# Altium PCB CFD_Chip_Test_v5_evenFootprintBadTDC.PcbDoc
Units mil, origin at the board's own origin, x right, y up, seen from the top; angles counter-clockwise.
Board outline 3675 x 2835 mil, 2 copper layers (Top Layer, Bottom Layer); 90 components, 63 nets, 345 pads, 124 vias.
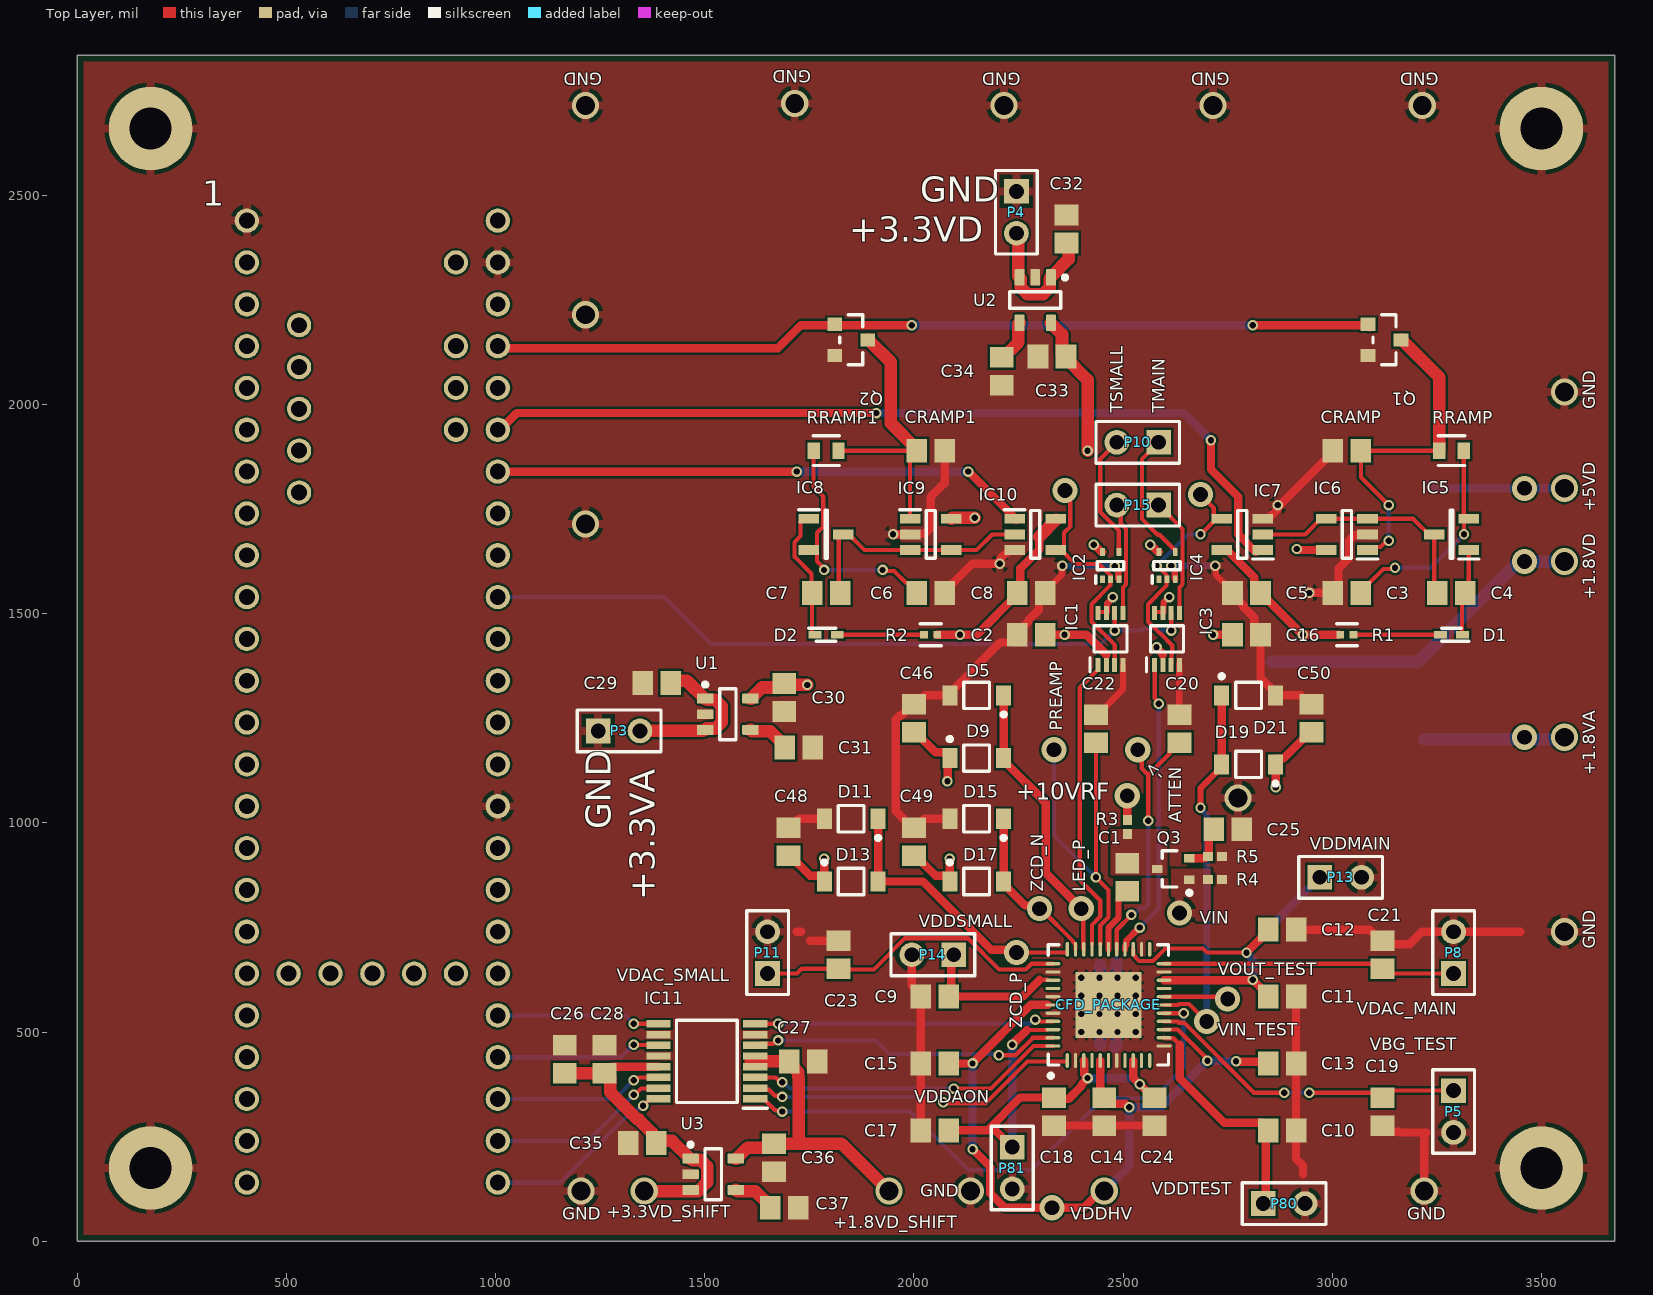
[diagram p0: Top Layer view]
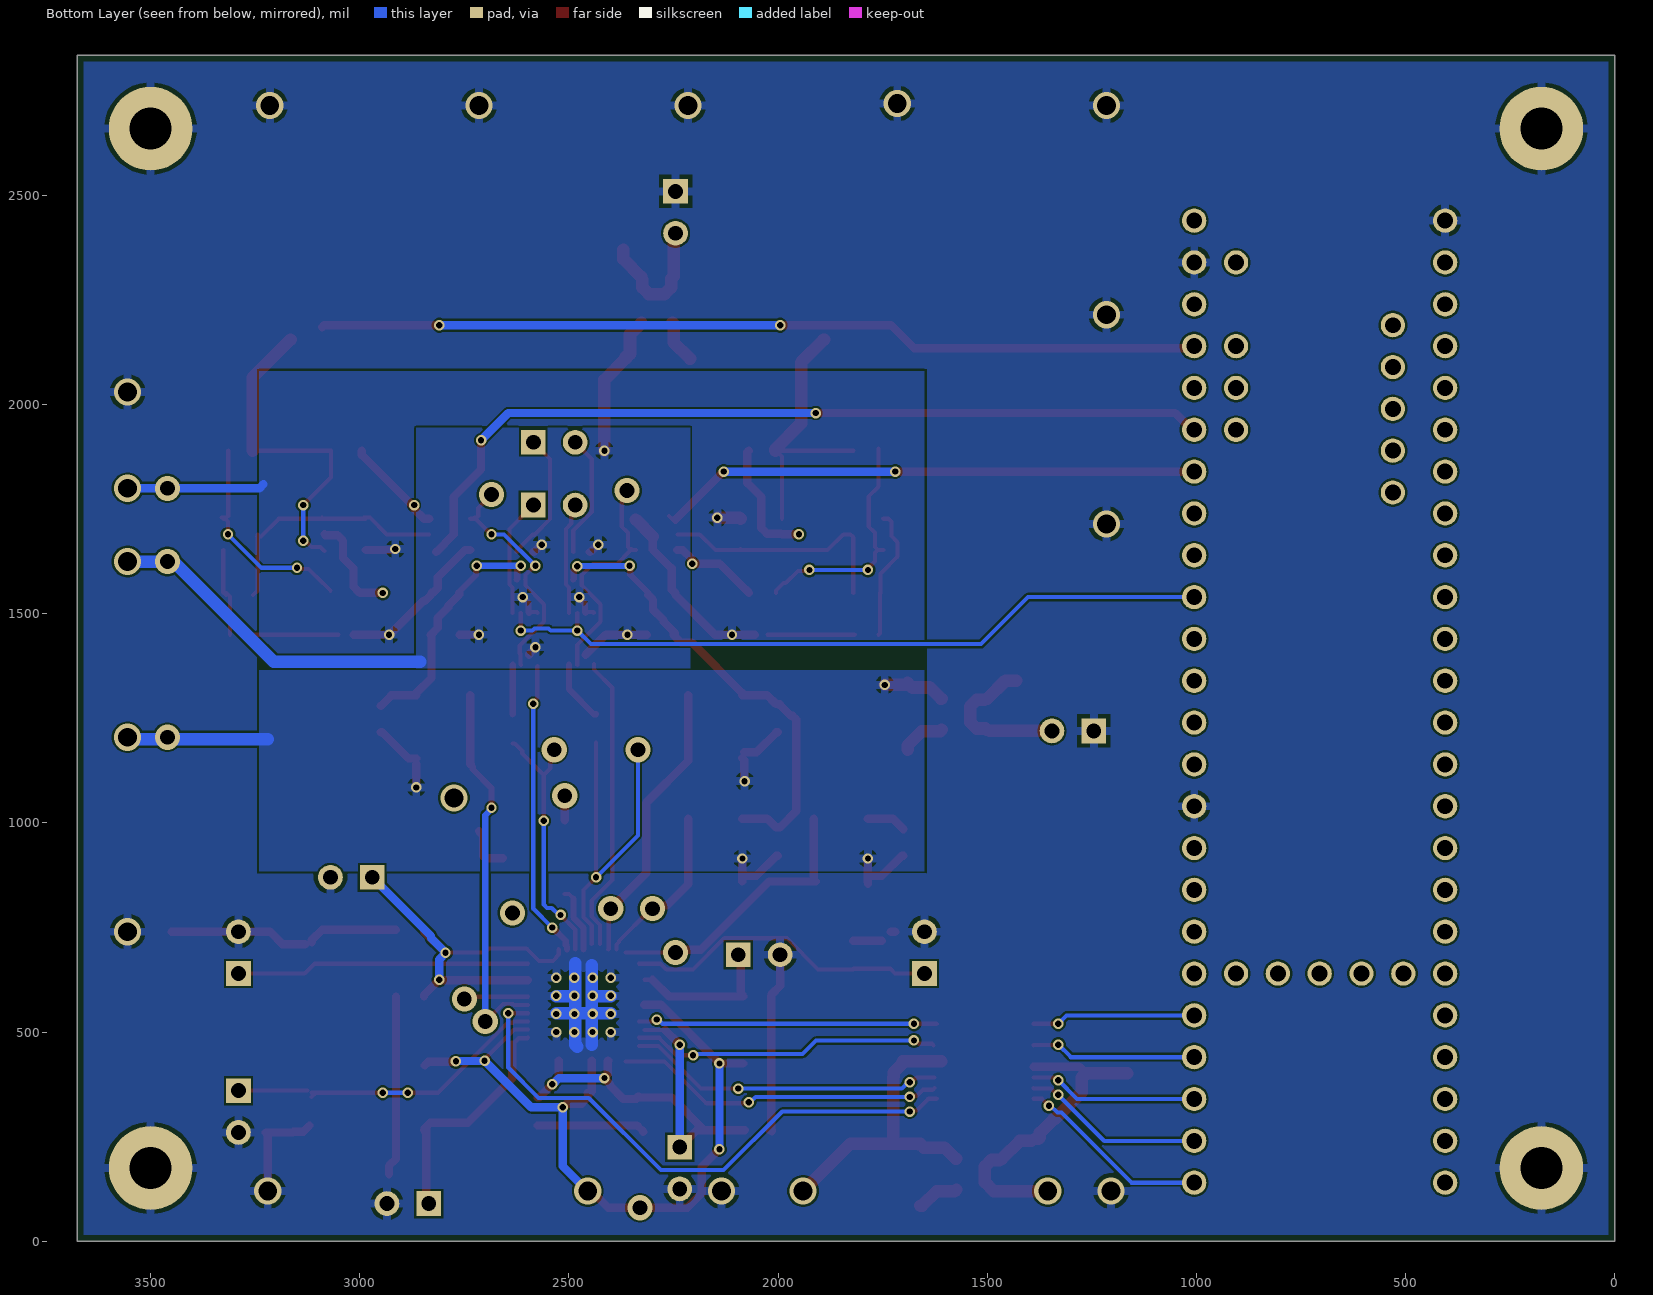
[diagram p1: Bottom Layer view, seen from below]

## Layer stack, top to bottom
Top Solder: solder mask 0.4, Solder Resist, Dk 3.5
Top Layer: signal copper 1.4
Dielectric 1: dielectric 12.6, FR-4, Dk 4.8
Bottom Layer: signal copper 1.4
Bottom Solder: solder mask 0.4, Solder Resist, Dk 3.5

## Board outline
0,0 3675,0 3675,2835 0,2835

## Design rules (kind name [scope] priority, off if disabled: settings)
AcuteAngle [All] p1: minimum=6.00000000000000E+0001 checktracksonly=FALSE
BoardOutlineClearance [All] p1: gap=15 ignorepadtopadclearanceinfootprint=FALSE
Clearance Clearance_outa_inner2 [InNamedPolygon('outa_inner2')] p1: gap=40 ignorepadtopadclearanceinfootprint=FALSE except(0: Arc-Hole Track-Hole SMDPad-Hole THPad-Hole Via-Hole Fill-Hole Poly-Hole Region-Hole Text-Hole)
Clearance Clearance_gnd_adc_vbus [InNamedPolygon('gnd_adc') vs InNet('VBUS')] p2: gap=60 ignorepadtopadclearanceinfootprint=FALSE except(0: Arc-Hole Track-Hole SMDPad-Hole THPad-Hole Via-Hole Fill-Hole Poly-Hole Region-Hole Text-Hole)
Clearance Clearance_gnd_adc [InNamedPolygon('gnd_adc')] p3: gap=20 ignorepadtopadclearanceinfootprint=FALSE except(0: Arc-Hole Track-Hole SMDPad-Hole THPad-Hole Via-Hole Fill-Hole Poly-Hole Region-Hole Text-Hole)
Clearance Clearance_dgnd [InNamedPolygon('dgnd')] p4: gap=15 ignorepadtopadclearanceinfootprint=FALSE except(0: Arc-Hole Track-Hole SMDPad-Hole THPad-Hole Via-Hole Fill-Hole Poly-Hole Region-Hole Text-Hole)
Clearance Clearance_vbus_keepout [InPolygon vs OnLayer('Keep-Out Layer')] p5: gap=20 ignorepadtopadclearanceinfootprint=FALSE except(0: Arc-Hole Track-Hole SMDPad-Hole THPad-Hole Via-Hole Fill-Hole Poly-Hole Region-Hole Text-Hole)
Clearance Clearance_vbus [InNamedPolygon('vbus')] p6: gap=60 ignorepadtopadclearanceinfootprint=FALSE except(0: Arc-Hole Track-Hole SMDPad-Hole THPad-Hole Via-Hole Fill-Hole Poly-Hole Region-Hole Text-Hole)
Clearance Clearance_gnd [InNamedPolygon('gnd')] p7: gap=10 ignorepadtopadclearanceinfootprint=FALSE except(0: Arc-Hole Track-Hole SMDPad-Hole THPad-Hole Via-Hole Fill-Hole Poly-Hole Region-Hole Text-Hole)
Clearance [All] p8: gap=5 ignorepadtopadclearanceinfootprint=FALSE except(0: Arc-Hole Track-Hole SMDPad-Hole THPad-Hole Via-Hole Fill-Hole Poly-Hole Region-Hole Text-Hole)
DiffPairsRouting [All] p1: maxlimit=25 minlimit=5 mostfreqgap=6 toplayer_minwidth=10 toplayer_maxwidth=15 toplayer_prefwidth=15 bottomlayer_minwidth=10 bottomlayer_maxwidth=15 bottomlayer_prefwidth=15 maxuncoupledlength=500
HoleSize [All] p1: absolutevalues=TRUE maxlimit=300 minlimit=10 maxpercent=80.000 minpercent=20.000
MinimumAnnularRing [All] p1: minimumring=5
MinimumSolderMaskSliver [All] p1: minsoldermaskwidth=2
PlaneConnect [All] p1: planeconnectstyle=Relief reliefexpansion=5 reliefentries=4 reliefconductorwidth=10 reliefairgap=10
PolygonConnect PolygonConnect_4 [All vs IsNamedPolygon('NONET_L-01_P-001')] p1: thpad.connectstyle=Relief thpad.reliefconductorwidth=20 thpad.reliefentries=4 thpad.polygonreliefangle="90 Angle" thpad.airgapwidth=10 smdpad.connectstyle=Direct smdpad.reliefconductorwidth=10 smdpad.reliefentries=4 smdpad.polygonreliefangle="90 Angle" smdpad.airgapwidth=10 via.connectstyle=Relief via.reliefconductorwidth=20 via.reliefentries=4 via.polygonreliefangle="90 Angle" via.airgapwidth=10
PolygonConnect PolygonConnect_3 [All] p2: thpad.connectstyle=Relief thpad.reliefconductorwidth=20 thpad.reliefentries=4 thpad.polygonreliefangle="90 Angle" thpad.airgapwidth=10 smdpad.connectstyle=Direct smdpad.reliefconductorwidth=10 smdpad.reliefentries=4 smdpad.polygonreliefangle="90 Angle" smdpad.airgapwidth=10 via.connectstyle=Relief via.reliefconductorwidth=20 via.reliefentries=4 via.polygonreliefangle="90 Angle" via.airgapwidth=10
PolygonConnect PolygonConnect_2 [All vs IsNamedPolygon('NONET_L-01_P-001')] p3: thpad.connectstyle=Relief thpad.reliefconductorwidth=10 thpad.reliefentries=4 thpad.polygonreliefangle="90 Angle" thpad.airgapwidth=10 smdpad.connectstyle=Direct smdpad.reliefconductorwidth=10 smdpad.reliefentries=4 smdpad.polygonreliefangle="90 Angle" smdpad.airgapwidth=10 via.connectstyle=Relief via.reliefconductorwidth=20 via.reliefentries=4 via.polygonreliefangle="90 Angle" via.airgapwidth=10
PolygonConnect PolygonConnect_1 [All vs IsNamedPolygon('NONET_L-01_P-001')] p4: thpad.connectstyle=Relief thpad.reliefconductorwidth=10 thpad.reliefentries=4 thpad.polygonreliefangle="90 Angle" thpad.airgapwidth=10 smdpad.connectstyle=Direct smdpad.reliefconductorwidth=10 smdpad.reliefentries=4 smdpad.polygonreliefangle="90 Angle" smdpad.airgapwidth=10 via.connectstyle=Relief via.reliefconductorwidth=20 via.reliefentries=4 via.polygonreliefangle="90 Angle" via.airgapwidth=10
PolygonConnect [All] p5: connectstyle=Relief reliefconductorwidth=6 reliefentries=4 polygonreliefangle="90 Angle" airgapwidth=6
RoutingVias [All] p1: holewidth=12 width=24 viastyle="Through Hole" minholewidth=10 minwidth=22 maxholewidth=200 maxwidth=200
SilkToSilkClearance [All] p1: silktosilkclearance=5
SilkToSolderMaskClearance [IsPad] p1: minsilkscreentomaskgap=3 clearancetoexposedcopper=FALSE
SolderMaskExpansion [All] p1: expansion=2.2 istentingtop=FALSE
Width [All] p1: maxlimit=1000 minlimit=5 preferedwidth=10 minimp=50.000000 maximp=50.000000 favimp=50.000000
24 further rules are at their usual default settings.

## Classes and differential pairs
component class TAC: C3 C4 C5 C6 C7 C8 CRAMP CRAMP1 D1 D2 IC5 IC6 IC7 IC8 IC9 IC10 Q1 Q2 R1 R2 RRAMP RRAMP1
component class Interface: 1 C1 C19 C20 C21 C22 C23 C25 C26 C27 C28 C29 C30 C31 C32 C33 C34 C35 C36 C37 C46 C48 C49 C50 D5 D9 D11 D13 D15 D17 D19 D21 IC11 P3 P4 P5 P8 P10 P11 P13 P14 P15 P80 P81 Q3 R3 R4 R5 U1 U2 U3
component class Chip: C2 C9 C10 C11 C12 C13 C14 C15 C16 C17 C18 C24 CFD_PACKAGE IC1 IC2 IC3 IC4

## Components (designator, comment, footprint, x,y, rotation, side; value= is the part's Value field where it differs from the comment)
1 "TEENSY_3.5/3.6" TEENSY_3.5/3.6 705,1340 r270 top
C1 "Value?" CAPC2013X140X45NL15T25 2510,870 r270 top
C2 ".01uF" CAPC2013X140X45NL15T25 2280,1450 r0 top
C3 ".1uF" CAPC2013X140X45NL15T25 3035,1550 r0 top
C4 "1uF" CAPC2013X140X45NL15T25 3285,1550 r0 top
C5 ".1uF" CAPC2013X140X45NL15T25 2795,1550 r0 top
C6 ".1uF" CAPC2013X140X45NL15T25 2040,1550 r180 top
C7 "1uF" CAPC2013X140X45NL15T25 1790,1550 r180 top
C8 ".1uF" CAPC2013X140X45NL15T25 2280,1550 r180 top
C9 ".01uF" CAPC2013X140X45NL15T25 2050,585 r0 top
C10 ".01uF" CAPC2013X140X45NL15T25 2880,265 r180 top
C11 ".01uF" CAPC2013X140X45NL15T25 2880,585 r180 top
C12 ".01uF" CAPC2013X140X45NL15T25 2880,745 r180 top
C13 ".01uF" CAPC2013X140X45NL15T25 2880,425 r180 top
C14 ".01uF" CAPC2013X140X45NL15T25 2455,310 r90 top
C15 ".01uF" CAPC2013X140X45NL15T25 2050,425 r0 top
C16 ".01uF" CAPC2013X140X45NL15T25 2795,1450 r180 top
C17 ".01uF" CAPC2013X140X45NL15T25 2050,265 r0 top
C18 ".01uF" CAPC2013X140X45NL15T25 2335,310 r90 top
C19 "(.01uF)" CAPC2013X140X45NL15T25 3120,310 r90 top
C20 "(.01uF)" CAPC2013X140X45NL15T25 2635,1225 r270 top
C21 "(.01uF)" CAPC2013X140X45NL15T25 3120,685 r270 top
C22 "(.01uF)" CAPC2013X140X45NL15T25 2435,1225 r270 top
C23 "(.01uF)" CAPC2013X140X45NL15T25 1820,685 r270 top
C24 ".01uF" CAPC2013X140X45NL15T25 2575,310 r90 top
C25 "" CAPC2013X140X45NL15T25 2750,985 r180 top
C26 ".1uF" CAPC2013X140X45NL15T25 1165,435 r270 top
C27 ".1uF" CAPC2013X140X45NL15T25 1735,430 r0 top
C28 "1uF" CAPC2013X140X45NL15T25 1260,435 r270 top
C29 "" CAPC2013X140X45NL15T25 1385,1335 r0 top
C30 "" CAPC2013X140X45NL15T25 1690,1300 r90 top
C31 "" CAPC2013X140X45NL15T25 1725,1180 r180 top
C32 "" CAPC2013X140X45NL15T25 2365,2420 r270 top
C33 "" CAPC2013X140X45NL15T25 2330,2115 r0 top
C34 "" CAPC2013X140X45NL15T25 2210,2080 r90 top
C35 "" CAPC2013X140X45NL15T25 1350,235 r0 top
C36 "" CAPC2013X140X45NL15T25 1665,200 r90 top
C37 "" CAPC2013X140X45NL15T25 1690,80 r180 top
C46 ".01uF" CAPC2013X140X45NL15T25 2000,1250 r270 top
C48 ".01uF" CAPC2013X140X45NL15T25 1700,955 r270 top
C49 ".01uF" CAPC2013X140X45NL15T25 2000,955 r270 top
C50 ".01uF" CAPC2013X140X45NL15T25 2950,1250 r270 top
CFD_PACKAGE "CFD_package" QFN50P700X700X80_HS-45N_WIDEVIAS 2465,565 r90 top
CRAMP "1nF" CAPC2013X140X45NL15T25 3035,1890 r0 top
CRAMP1 "1nF" CAPC2013X140X45NL15T25 2040,1890 r180 top
D1 "1N4148WT" SODFL1608X70N 3285,1450 r180 top
D2 "1N4148WT" SODFL1608X70N 1790,1450 r0 top
D5 "" ONSC-SOD-123-2-425-04_V 2150,1155 r0 top
D9 "" ONSC-SOD-123-2-425-04_V 2150,1305 r180 top
D11 "" ONSC-SOD-123-2-425-04_V 1850,860 r0 top
D13 "" ONSC-SOD-123-2-425-04_V 1850,1010 r180 top
D15 "" ONSC-SOD-123-2-425-04_V 2150,860 r0 top
D17 "" ONSC-SOD-123-2-425-04_V 2150,1010 r180 top
D19 "" ONSC-SOD-123-2-425-04_V 2800,1140 r180 top
D21 "" ONSC-SOD-123-2-425-04_V 2800,1305 r0 top
IC1 "NL17SZ74USG" SOP50P310X90-8N 2470,1440 r90 top
IC2 "NL17SZ14XV5T2G" SOTFL50P160X60-5N 2470,1615 r90 top
IC3 "NL17SZ74USG" SOP50P310X90-8N 2605,1440 r90 top
IC4 "NL17SZ14XV5T2G" SOTFL50P160X60-5N 2605,1615 r90 top
IC5 "MAX6018BEUR18+T" SOT95P237X112-3N 3285,1690 r180 top
IC6 "MAX4490AUK+T" SOT95P280X145-5N 3035,1690 r180 top
IC7 "TMUX1101DBVR" SOT95P280X145-5N 2785,1690 r180 top
IC8 "MAX6018BEUR18+T" SOT95P237X112-3N 1790,1690 r0 top
IC9 "MAX4490AUK+T" SOT95P280X145-5N 2040,1690 r0 top
IC10 "TMUX1101DBVR" SOT95P280X145-5N 2290,1690 r0 top
IC11 "MAX13003EEUE+" SOP65P640X110-16N 1505,430 r180 top
P3 "Header 2" HDR1X2 1245,1220 r0 top
P4 "Header 2" HDR1X2 2245,2510 r270 top
P5 "Header 2" HDR1X2 3290,360 r270 top
P8 "Header 2" HDR1X2 3290,640 r90 top
P10 "Header 2" HDR1X2 2585,1910 r180 top
P11 "Header 2" HDR1X2 1650,640 r90 top
P13 "Header 2" HDR1X2 2970,870 r0 top
P14 "Header 2" HDR1X2 2095,685 r180 top
P15 "Header 2" HDR1X2 2585,1760 r180 top
P80 "Header 2" HDR1X2 2835,90 r0 top
P81 "Header 2" HDR1X2 2235,225 r270 top
Q1 "2N7002K" FP-318-08-MFG 3125,2155 r0 top
Q2 "2N7002K" FP-318-08-MFG 1850,2155 r0 top
Q3 "BFR182W" INF-SOT323_L 2620,890 r180 top
R1 "470Ohm" FP-CRCW0402-e3-IPC_C 3035,1450 r180 top
R2 "470Ohm" FP-CRCW0402-e3-IPC_C 2040,1450 r0 top
R3 "" RESC1005X40X25NL05T10 2510,990 r270 top
R4 "(50Ohm)" RESC1005X40X25NL05T10 2720,865 r180 top
R5 "" RESC1005X40X25NL05T10 2720,920 r180 top
RRAMP "1kOhm" FP-CRCW0603-e3-MFG 3285,1890 r0 top
RRAMP1 "1kOhm" FP-CRCW0603-e3-MFG 1790,1890 r180 top
U1 "TPS73218DBVT" DBV0005A_N 1555,1260 r0 top
U2 "TPS73218DBVT" DBV0005A_N 2290,2250 r270 top
U3 "TPS73218DBVT" DBV0005A_N 1520,160 r0 top

## Footprints (in the part's own frame and the unit in brackets; to place one, negate y for a bottom-side part, rotate by r counter-clockwise, add the part's x,y. Pads: shape width x height; smd on the part's side, far side on the other; paste and mask are expansions set on the pad)
CAPC2013X140X45NL15T25 [mm] "Chip Capacitor, 2-Leads, Body 2.00x1.25mm, IPC Medium Density"
  rect 1.25x1.45 smd: 1(-0.85,0) 2(0.85,0)
  body extent -1.08,-0.7 1.07,0.7, height 1.4
DBV0005A_N [mm] "SOT23, 5-Leads, Body 3.05x1.75mm, Pitch 0.95mm, IPC Medium Density"
  rrect17% 1x0.6 smd: 1(-1.375,0.95) 2(-1.375,0) 3(-1.375,-0.95) 4(1.375,-0.95) 5(1.375,0.95)
  silkscreen extent -1.5,-1.55 0.5,1.92, body extent -1.42,-1.46 1.42,1.46, height 1.08
FP-318-08-MFG [mm]
  rect 0.9x0.8 smd paste+0 mask+0: 1(-1,0.95) 2(-1,-0.95) 3(1,0)
  silkscreen extent -0.7,-1.52 0.7,1.52, body extent -1.55,-1.62 1.55,1.62, height 0.25
FP-CRCW0402-e3-IPC_C [mil]
  rect 18.43x18.6 smd paste+0 mask+0: 1(-15.83,0) 2(15.83,0)
  silkscreen extent -25,-27 25,27, body extent -29,-15 29,15, height 10
FP-CRCW0603-e3-MFG [mm]
  rect 0.75x1 smd paste+0 mask+0: 1(-0.75,0) 2(0.75,0)
  silkscreen extent -0.8,-0.9 0.8,0.9, body extent -1.22,-0.6 1.22,0.6, height 0.25
HDR1X2 [mm] "Connector; Header; 2 Position"
  rect 1.5x1.5 hole 0.9: 1(0,0)
  round 1.5 hole 0.9: 2(2.54,0)
  silkscreen extent -1.27,-1.27 3.81,1.27
INF-SOT323_L [mm] "SOT23, 3-Leads, Body 2x1.25 mm, Pitch 0.65 mm, IPC High Density"
  rect 0.65x0.5 smd: 1(-0.975,0.65) 2(-0.975,-0.65) 3(0.975,0)
  silkscreen extent -1.1,-1.1 0.67,1.57, body extent -0.67,-1.1 0.67,1.1, height 1
ONSC-SOD-123-2-425-04_V [mm] "SOD, 2-Leads, Body 2.69x1.6mm"
  rect 0.91x1.22 smd: 1(-1.635,0) 2(1.635,0)
  silkscreen extent -1.76,-0.8 0.78,1.28, body extent -1.35,-0.8 1.35,0.8, height 1.35
QFN50P700X700X80_HS-45N_WIDEVIAS [mm] "QFN, 44-Leads, Body 7.00x7.00mm, Pitch 0.50mm, Thermal Pad 4.00x4.00mm, IPC Medium Density"
  oval 0.9x0.2 smd: 1(-3.375,2.5) 2(-3.375,2) 3(-3.375,1.5) 4(-3.375,1) 5(-3.375,0.5) 6(-3.375,0) 7(-3.375,-0.5) 8(-3.375,-1) 9(-3.375,-1.5) 10(-3.375,-2) 11(-3.375,-2.5) 23(3.375,-2.5) 24(3.375,-2) 25(3.375,-1.5) 26(3.375,-1) 27(3.375,-0.5) 28(3.375,0) 29(3.375,0.5) 30(3.375,1) 31(3.375,1.5) 32(3.375,2) 33(3.375,2.5)
  oval 0.2x0.9 smd: 12(-2.5,-3.375) 13(-2,-3.375) 14(-1.5,-3.375) 15(-1,-3.375) 16(-0.5,-3.375) 17(0,-3.375) 18(0.5,-3.375) 19(1,-3.375) 20(1.5,-3.375) 21(2,-3.375) 22(2.5,-3.375) 34(2.5,3.375) 35(2,3.375) 36(1.5,3.375) 37(1,3.375) 38(0.5,3.375) 39(0,3.375) 40(-0.5,3.375) 41(-1,3.375) 42(-1.5,3.375) 43(-2,3.375) 44(-2.5,3.375)
  rect 4x4 smd: 35(0,0)
  silkscreen extent -4.42,-3.65 3.65,3.65, body extent -3.5,-3.5 3.5,3.5, height 0.8
RESC1005X40X25NL05T10 [mm] "Chip Resistor, 2-Leads, Body 1.00x0.50mm, IPC Medium Density"
  rect 0.6x0.55 smd: 1(-0.425,0) 2(0.425,0)
  body extent -0.53,-0.27 0.53,0.28, height 0.4
SODFL1608X70N [mm]
  rect 0.78x0.47 smd: 1(-0.675,0) 2(0.675,0)
  silkscreen extent -1.06,-0.4 0.6,0.4, body extent -0.8,-0.4 0.8,0.4, height 0.7
SOP50P310X90-8N [mm]
  rect 0.85x0.3 smd: 1(-1.575,0.75) 2(-1.575,0.25) 3(-1.575,-0.25) 4(-1.575,-0.75) 5(1.575,-0.75) 6(1.575,-0.25) 7(1.575,0.25) 8(1.575,0.75)
  silkscreen extent -2,-1 0.8,1.25, body extent -1.55,-1 1.55,1, height 0.9
SOP65P640X110-16N [mm]
  rect 1.475x0.45 smd: 1(-2.938,2.275) 2(-2.938,1.625) 3(-2.938,0.975) 4(-2.938,0.325) 5(-2.938,-0.325) 6(-2.938,-0.975) 7(-2.938,-1.625) 8(-2.938,-2.275) 9(2.938,-2.275) 10(2.938,-1.625) 11(2.938,-0.975) 12(2.938,-0.325) 13(2.938,0.325) 14(2.938,0.975) 15(2.938,1.625) 16(2.938,2.275)
  silkscreen extent -3.67,-2.5 1.85,2.85, body extent -3.2,-2.5 3.2,2.5, height 1.1
SOT95P237X112-3N [mm]
  rect 1.25x0.6 smd: 1(-1.05,0.95) 2(-1.05,-0.95) 3(1.05,0)
  silkscreen extent -1.68,-1.46 0.08,1.5, body extent -1.18,-1.46 1.18,1.46, height 1.12
SOT95P280X145-5N [mm]
  rect 1.25x0.6 smd: 1(-1.25,0.95) 2(-1.25,0) 3(-1.25,-0.95) 4(1.25,-0.95) 5(1.25,0.95)
  silkscreen extent -1.88,-1.45 0.28,1.5, body extent -1.4,-1.45 1.4,1.45, height 1.45
SOTFL50P160X60-5N [mm]
  rect 0.465x0.3 smd: 1(-0.832,0.5) 2(-0.832,0) 3(-0.832,-0.5) 4(0.832,-0.5) 5(0.832,0.5)
  silkscreen extent -1.06,-0.8 0.25,0.9, body extent -0.8,-0.8 0.8,0.8, height 0.6
TEENSY_3.5/3.6 [mil]
  round 58 / inner round 60 / far side round 58 hole 38: 0/RX(-1000,-300) 1/TX(-900,-300) 2(-800,-300) 3/CANTX(-700,-300) 3V3(300,-300) 3V3_2(700,-100) 3V3_LO(-900,300) 4/CANRX(-600,-300) 5(-500,-300) 6(-400,-300) 7(-300,-300) 8(-200,-300) 9/CS(-100,-300) 10/CS(0,-300) 11/MOSI(100,-300) 12/MISO(200,-300) 13/SCK(200,300) 14/A0(100,300) 15/A1(0,300) 16/A2(-100,300) 17/A3(-200,300) 18/A4/SDA(-300,300) 19/A5/SCL(-400,300) 20/A6(-500,300) 21/A7(-600,300) 21/DAC0(500,300) 22/A8(-700,300) 23/A9(-800,300) 24(400,-300) 25(500,-300) 26(600,-300) 27(700,-300) 28(800,-300) 29(900,-300) 30(1000,-300) 31/A12(1100,-300) 32/A13(1200,-300) 33/A14(1200,300) 34/A15(1100,300) 35/A16(1000,300) 36/A17(900,300) 37/A18(800,300) 38/A19(700,300) 39/A20(600,300) A10(-700,200) A11(-600,200) A22/DAC1(400,300) AGND(-1000,300) AREF(-800,200) GND(-1100,-300) GND2(300,300) GND3(700,0) PROG(700,100) RESET(700,200) U5V(-850,-175) UD+(-650,-175) UD-(-750,-175) UGND1(-550,-175) UGND2(-450,-175) VBAT(700,-200) VIN(-1100,300) VUSB(-1000,200)

## Part data
C1 C2 C3 C4 C5 C6 C7 C8 C9 C10 C11 C12 C13 C14 C15 C16 C17 C18 C19 C20 C21 C22 C23 C24 C25 C26 C27 C28 C29 C30 C31 C32 C33 C34 C35 C36 C37 C46 C48 C49 C50 CRAMP CRAMP1: library part CMP-2007-03395-1, "0402", Manufacturer=Murata, Part Number=GRM21BR71A106KE51L
D1 D2: "Diode", Manufacturer_Name=SEMTECH, Datasheet Link=https://datasheet.lcsc.com/szlcsc/Semtech-1N4148WT_C27748.pdf, Height=0.7mm, Manufacturer_Part_Number=1N4148WT
D5 D9 D11 D13 D15 D17 D19 D21: library part CMP-1060-00509-1, "Zener Voltage Regulator, 2-Pin SOD-123, Pb-Free, Tape and Reel", Manufacturer="On Semiconductor", PartNumber=MMSZ4679T1G, ComponentLink1Description="Manufacturer URL", ComponentLink1URL=http://www.onsemi.com/, ComponentLink2Description=Datasheet, ComponentLink2URL=http://www.onsemi.com/pub_link/Collateral/MMSZ4678T1-D.PDF, ComponentLink3Description="Package Specification", ComponentLink3URL=http://www.onsemi.com/pub_link/Collateral/425-04.PDF, DatasheetVersion="Rev. 9", Mounting Technology="Surface Mount", P Max (W)=0.5, PackageDescription="2-Pin SOD, Body 1.6 x 2.69 mm", PackageReference=SOD-123-2-425-04, PackageVersion="Rev. G, 10/2009", Packing="Tape and Reel", RoHS=Pb-Free, VZ Typ (V)=2
IC1 IC3: "Flip Flops 1.65-5.5V CMOS Single D-Type", Manufacturer_Name="ON Semiconductor", Datasheet Link=http://www.onsemi.com/pub/Collateral/NL17SZ74-D.PDF, Height=0.9mm, Manufacturer_Part_Number=NL17SZ74USG
IC2 IC4: "Integrated Circuit", Manufacturer_Name="ON Semiconductor", Mouser2 Part Number=863-NL17SZ14XV5T2G, Datasheet Link=https://componentsearchengine.com//NL17SZ14XV5T2G.pdf, Height=0.6mm, Manufacturer_Part_Number=NL17SZ14XV5T2G, Mouser2 Price/Stock=https://www.mouser.com/Search/Refine.aspx?Keyword=863-NL17SZ14XV5T2G
IC5 IC8: "Voltage References Precision, Micropower, 1.8V Supply, Low-Dropout, SOT23 Voltage Reference", Manufacturer_Name="Maxim Integrated", Datasheet Link=https://pdfserv.maximintegrated.com/en/ds/MAX6018-MAX6018B.pdf, Height=1.12mm, Manufacturer_Part_Number=MAX6018BEUR18+T
IC6 IC9 IC11: "Integrated Circuit", Manufacturer_Name="Maxim Integrated"
  IC6 IC9: Datasheet Link=https://pdfserv.maximintegrated.com/en/ds/MAX4490-MAX4492.pdf, Height=1.45mm, Manufacturer_Part_Number=MAX4490AUK+T
  IC11: Datasheet Link=https://pdfserv.maximintegrated.com/en/ds/MAX13000E-MAX13005E.pdf, Height=1.1mm, Manufacturer_Part_Number=MAX13003EEUE+
IC7 IC10: "Analog Switch ICs 3-pA on-state leakage current, 5-V, 1:1 (SPST), 1-channel precision switch (active low) 5-SOT-23 -40 to 125", Manufacturer_Name="Texas Instruments", Datasheet Link=https://www.ti.com/lit/ds/symlink/tmux1101.pdf?ts=1618527438207, Height=1.45mm, Manufacturer_Part_Number=TMUX1101DBVR
P3 P4 P5 P8 P10 P11 P13 P14 P15 P80 P81: "Header, 2-Pin", LatestRevisionDate=17-Jul-2002, LatestRevisionNote="Re-released for DXP Platform.", Publisher="Altium Limited"
Q1 Q2: library part CMP-07173-000009-1, "MOSFET N-CH 60V 300MA SOT23", Continuous Drain Current=320mA, Drain To Source Breakdown Voltage=60V, Drain To Source Resistance=1.19Ω, Gate To Source Voltage=20V, Input Capacitace At Vds="24.5pF @ 20V", Manufacturer="ON Semiconductor", Max Forward Diode Voltage=1.2V, Max Junction Temp=+150°C, Package=318-08, Power Dissipation=300mW, Pulse Drain Current=5A, Temperature="-55°C to +150°C", Temperature Range Low=-55°C, Typ Forward Diode Voltage=0.8V, Automotive=No, Category=Trans, ComponentLink2Description=Datasheet, ComponentLink2URL=https://www.onsemi.com/pub/Collateral/2N7002K-D.pdf, Depletion Mode=False, Device Class L1="Discrete Semiconductors", Device Class L2=Transistors, Device Class L3=MOSFETs, Digikey Description="MOSFET N-CH 60V 300MA SOT23", Drain To Source Voltage=60V, Footprint Url=https://www.onsemi.com/pub/Collateral/318-08.PDF, Gate Charge At Vgs="0.7nC @ 4.5V", Height=1.11mm, Ipc Land Pattern Name=SOT95P240X100-3, Lead Free=Yes, Manufacturer Part Number=2N7002K, Mouser Description="N-Channel 60 V 2 Ohm SMT Enhancement Mode Field Effect Transistor SOT-23", Number Of Channels=1, Number Of N Channels=1, Octopart=https://octopart.com/2n7002k-on+semiconductor-84408900, RoHS=TRUE, Rthja Max=417°C/W, Standoff Height=0.01mm, Temperature Range High=+150°C, Threshold Vgs Max=2.3V, Threshold Vgs Min=1V, Transconductance=0.53S, Turn Off Delay Time=55.8ns, Turn On Delay Time=12.2ns
Q3: library part CMP-1191-00013-1, "NPN Silicon RF Transistor, 12 V VCEO, 35 mA IC, 19 dB Gmax, SOT323, Green", Manufacturer=Infineon, ComponentLink1Description="Manufacturer URL", ComponentLink1URL=http://www.infineon.com/, ComponentLink2Description=Datasheet, ComponentLink2URL=http://www.infineon.com/dgdl/bfr182w.pdf?folderId=db3a30431400ef68011425b1354605c1&fileId=db3a30431400ef680114269d1e43064c&location=en.Products.RF.RF_Transistors_.Low_Noise_Si_Transistors_up_to_2_5_GHz.DATASHEET.bfr182w.pdf, ComponentLink3Description="Package Specification", ComponentLink3URL=http://www.infineon.com/dgdl/SOT323-Package_Overview.pdf?folderId=db3a30431936bc4b0119533e1dcb3c92&fileId=db3a30431936bc4b011953495f283cb1, DatasheetVersion=Apr-2010, Gmax (typ)="19 dB", Green=yes, Group="For low frequencies e.g. VHF/UHF", Halogen-free=yes, IC (max)="35 mA", Mounting Technology="Surface Mount", NFmin (typ)="0.9 dB", PackageDescription="3-Pin Small Outline Transistor Package, 1.25 x 2 mm Body, 0.65 mm Pitch", PackageReference=SOT323, PartNumber=BFR182W, Ptot (max)=250mW, VCEO (max)="12 V"
R1 R2: library part CMP-2002-08122-2, "RES Thick Film, 0Ω, 0.063W, 0402", Case Code (Imperial)=0402, Case Code (Metric)=1005, Max Operating Temperature=155°C, Max Power Dissipation=63mW, Min Operating Temperature=-55°C, Package Quantity=1, Resistance=0mR, Temperature Coefficient=100ppm/°C, Tolerance=5%, Voltage Rating=50V, Case/Package=0402, Composition="Thick Film", Contact Plating=Tin, Depth=0.5mm, Features="Automotive AEC-Q200", Height=0.35mm, Lead Free="Lead Free", Length=1mm, Military Standard=Not, Mount="Surface Mount", Number of Terminations=2, Packaging="Tape and Reel", Power Rating=63mW, Radiation Hardening=No, Termination=SMD/SMT, Voltage Rating (DC)=50V, Weight=2.3E-05oz, Width=0.5mm
R3 R4 R5: library part CMP-2002-07472-1, "0402", Manufacturer="Yageo / Phycomp", Part Number=RC0402FR-071KL
RRAMP RRAMP1: library part CMP-2000-03013-2, "RES Thick Film, 1MΩ, 1%, 0.1W, 100ppm/°C, 0603", Case Code (Imperial)=0603, Case Code (Metric)=1608, Max Operating Temperature=155°C, Max Power Dissipation=100mW, Min Operating Temperature=-55°C, Package Quantity=10, Resistance=1MR, Temperature Coefficient=100ppm/°C, Tolerance=1%, Voltage Rating=75V, Case/Package=0603, Composition="Thick Film", Contact Plating=Tin, Depth=0.85mm, Features="Automotive AEC-Q200", Height=0.45mm, Lead Free="Lead Free", Length=1.55mm, Military Standard=Not, Mount="Surface Mount", Number of Pins=2, Number of Terminations=2, Packaging="Tape and Reel", Power Rating=100mW, Radiation Hardening=No, Termination=SMD/SMT, Voltage Rating (DC)=75V, Weight=7.1E-05oz, Width=0.85mm
U1 U2 U3: library part CMP-0394-00378-2, "Single Output Fast Transient Response LDO, 200 mA, Fixed 1.8 V Output, 1.7 to 5.5 V Input, with Reverse Current Protection, 5-pin SOT-23 (DBV), -40 to 85 degC, Green (RoHS & no Sb/Br)", Manufacturer="Texas Instruments", Accuracy(%)=1, Code_JEDEC=MO-178, ComponentLink1Description="Manufacturer URL", ComponentLink1URL=http://www.ti.com/, ComponentLink2Description=Datasheet, ComponentLink2URL=http://www.ti.com/general/docs/lit/getliterature.tsp?genericPartNumber=TPS73218&fileType=pdf, ComponentLink3Description="Package Specification", ComponentLink3URL=http://www.ti.com/litv/pdf/mpds018i, DatasheetVersion=SBVS037O, Eco-Plan="Green (RoHS & no Sb/Br)", Fixed Output Options(V)=1.8, Iout(Max)(A)=0.25, Iq(Typ)(mA)=0.4, Mounting Technology="Surface Mount", PackageDescription="5-Pin Plastic Small Outline, Body 1.60 Ãƒâ€” 2.90 mm, Pitch 0.95 mm", PackageReference=DBV0005A, PackageVersion=4073253-4/K, PartNumber=TPS73218DBVT, SubFamily="Single Channel LDO", Vdo(Typ)(mV)=40, Vin(Max)(V)=5.5, Vin(Min)(V)=1.7, Vout Adj(Max)(V)=1.8, Vout Adj(Min)(V)=1.8
1: DeviceSetName=TEENSY_3.5/3.6, GateName_1=G$1, LibraryName=Teensy356, Package=TEENSY_3.5/3.6, SymbolName_1=TEENSY_3.5/3.6

## Free pads (board coordinates)
  round 200 hole 100: 3(175,175) 3(175,2660) 3(3500,175) 3(3500,2660)

## Via types
v1: diameter 25, hole 15, Top Layer to Bottom Layer, 90 vias
v2: diameter 65, hole 45, Top Layer to Bottom Layer, 19 vias
v3: diameter 60, hole 35.43, Top Layer to Bottom Layer, 15 vias

## Nets (pads, with @x,y where several pads share a name; then routed paths per layer and width w, separated by ;. In a path a pad name is that pad's centre, name@x,y a point inside that pad or via, vN(x,y) a via of type N, cw(c..) or ccw(c..) an arc to the next point about the centre after c; other vN are vias at no path point)
+1.8VA: C30.2 C46.2 C48.2 C49.2 C50.2 D5.1 D11.1 D15.1 D19.1 U1.5 | length 1151.6
  Top Layer w20: C48.2 1703.94,921.54 1751.46,874.02 1777.72,874.02 1785,866.73 D11.1@1785,855 ; v1(1785,915) 1785.32,914.68 1785.32,860.31 D11.1 ; C49.2 2003.94,921.54 2051.46,874.02 2077.72,874.02 2085,866.73 D15.1@2085,865.47 ; C46.2 2003.94,1216.54 2051.46,1169.02 D5.1@2080.98,1169.02 ; v1(2080,1100) 2080.96,1100.96 2080.96,1150.33 D5.1 ; v1(2085,915) 2085.31,914.69 2085.31,860.32 D15.1 ; D19.1 2864.68,1139.69 2864.68,1085.32 v1(2865,1085) ; D19.1@2864.37,1154.02 2883.54,1154.02 2946.06,1216.54 C50.2
  Top Layer w30: U1.5 1610.63,1297.4 1637.09,1323.86 1678.86,1323.86 C30.2@1690,1335 ; C30.2 1693.46,1330 v1(1745,1330)
  Bottom Layer w30: 3220,1200 v2@3555,1200
  other v2: 3555,1205
  other v3: 3460,1205
+1.8VD: C2.2 C16.2 C33.2 IC1.2 IC1.7 IC1.8 IC2.5 IC3.2 IC3.7 IC3.8 IC4.5 U2.5 | length 1568.6
  Top Layer w10: IC1.8 2440.47,1503.35 2441.38,1504.25 2459.25,1504.25 IC1.7@2460,1505 ; IC3.8 2575.47,1503.35 2576.38,1504.25 2594.25,1504.25 IC3.7@2595,1505
  Top Layer w15: IC1.7 2461.44,1503.29 2461.44,1523.92 2475,1537.48 v1(2475,1540) ; IC3.7 2596.44,1503.29 2596.44,1526.44 v1(2610,1540)
  Top Layer w20: C2.2 v1(2360,1450) 2412.32,1450 2460.16,1402.16 ; v1(2430,1665) 2431.35,1665 2448.6,1647.76 IC2.5 ; v1(2565,1665) 2566.35,1665 2583.6,1647.76 IC4.5 ; v1(2580,1420) 2580,1418.65 2595.16,1403.49 2595.16,1402.16 ; v1(2715,1450) C16.2
  Top Layer w30: U2.5 2327.4,2194.37 2353.86,2167.91 2353.86,2121.14 C33.2@2360,2115 ; C33.2 2363.46,2111.06 2415,2059.53 v1(2415,1890)
  Bottom Layer w30: 2855,1385 3205,1385 3445,1625 v2@3560,1625
  other v2: 3555,1625
  other v3: 3460,1625
+1.8VD_SHIFT: C27.1 C36.2 IC11.4 IC11.5 U3.5 | length 716.5
  Top Layer w30: U3.5 1575.63,197.4 1602.09,223.86 1651.46,223.86 1660,232.4 C36.2@1665,232.4 ; 1610,430 1620.67,430 C27.1 1701.54,426.06 1723.86,403.74 1723.86,393.17 1725,392.03 1725,240 ; C36.2 1668.94,233.46 1725,233.46 1826.54,233.46 1935,125 v2@1935,120
  other v2: 1940,120
+3.3VA: C29.2 P3.2 U1.1 U1.3 | length 365
  Top Layer w30: P3.2 U1.3@1495,1220 ; C29.2@1430,1340 1456.77,1340 1499.37,1297.4 U1.1 ; U1.3 1504.06,1225.79 1525.26,1225.79 1540.55,1241.08 1540.55,1278.92 1525.26,1294.21 U1.1@1505.55,1294.21
+3.3VD: C32.2 P4.2 U2.1 U2.3 | length 319
  Top Layer w30: P4.2 2249.41,2405.59 2249.41,2307.32 U2.3 2255.79,2300.94 2255.79,2279.74 2271.08,2264.45 2308.92,2264.45 2324.21,2279.74 U2.1@2324.21,2299.45 ; U2.1 2327.4,2305.63 2370,2348.23 C32.2@2370,2370
+3.3VD_SHIFT: C26.2 C28.2 C35.2 IC11.13 U3.1 U3.3 | length 777.7
  Top Layer w20: C28.2@1260,400 1262.4,400 1263.94,401.54 1279.61,417.2 IC11.13
  Top Layer w30: C26.2 1258.46,401.54 C28.2@1260,400 ; C28.2 1263.94,401.54 1273.54,391.93 1273.54,356.46 1338.88,291.12 1341.85,291.12 1373.86,259.11 1373.86,248.54 1377.4,245 C35.2@1385,245 ; v2@1356.3,121.3 v2(1355,120) 1484.47,120 1505.55,141.08 1505.55,178.92 1490.26,194.21 U3.1@1470.55,194.21 ; C35.2@1395,240 1421.77,240 1464.37,197.4 U3.1
+5VD: C5.2 C8.2 IC6.5 IC7.5 IC9.5 IC10.5 R1.2 R2.2 | length 1287.6
  Top Layer w20: R2.2 2150.47,1450 2245,1544.53 C8.2@2245,1550 ; C8.2 2254.36,1557.83 2254.36,1608.54 2299.61,1653.79 2299.61,1684.61 ; IC7.5 2748.58,1652.6 2813.86,1587.32 2813.86,1561.14 C5.2@2825,1550 ; C5.2 2828.46,1546.06 2843.07,1531.46 2847.01,1531.46 2928.46,1450 R1.2@3015,1450 ; v1(2915,1655) 2916.35,1655 2918.75,1652.6 IC6.5
  Top Layer w30: IC9.5 2091.81,1730 v1(2145,1730) ; 2299.61,1684.61 IC10.5@2340,1725
  Bottom Layer w20: 3230,1810 3240,1800 v2@3560,1800
  other v1: 2110,1450 2930,1450
  other v2: 3555,1800
  other v3: 3460,1800
+10VRF: R3.1 | length 58.3
  Top Layer w20: R3.1 v3(2510,1065)
/RST_TIME: 1.17/A3 IC1.6 IC3.6 | length 1753.3
  Top Layer w10: IC1.6 2479.92,1501.93 2479.92,1460.08 v1(2480,1460) ; IC3.6 2614.92,1501.93 2614.92,1460.08 v1(2615,1460)
  Bottom Layer w10: 1.17/A3@1010,1540 1402.5,1540 1515,1427.5 2442.5,1427.5 2447.5,1427.5 v1(2480,1460) 2543.57,1460 2548.57,1465 2582.5,1465 2587.5,1460 v1(2615,1460)
/SCAN_IN: CFD_PACKAGE.1 IC11.2 | length 795.3
  Top Layer w10: IC11.2@1626.02,366.02 1629.88,362.17 1653.78,362.17 1668.07,347.87 1682.13,347.87 v1(1685,345) ; v1(2070,332.5) 2072.5,330 2171.8,330 2271.8,430 CFD_PACKAGE.1@2365,430
  Bottom Layer w10: v1(1685,345) 2053.44,345 2065.94,332.5 v1(2070,332.5)
/SCAN_IN_33: 1.34/A15 IC11.15 | length 436.5
  Top Layer w10: v1(1330,350) 1332.28,350 1347.79,365.51 1388.82,365.51 IC11.15
  Bottom Layer w10: 1.34/A15 1220,240 v1(1330,350)
/SCAN_LOAD: CFD_PACKAGE.44 IC11.3 | length 758.7
  Top Layer w10: IC11.3@1626.46,391.46 1669.48,391.46 1680.94,380 v1(1685,380) ; v1(2095,365) 2184.09,365 2285.66,466.57 CFD_PACKAGE.44
  Bottom Layer w10: v1(1685,380) 1689.06,380 1704.06,365 v1(2095,365)
/SCAN_LOAD_33: 1.35/A16 IC11.14 | length 405.7
  Top Layer w10: v1(1330,385) 1334.06,385 1340.67,391.61 IC11.14
  Bottom Layer w10: 1.35/A16 1285,340 v1(1330,385)
/SCAN_OUT: CFD_PACKAGE.41 IC11.8 | length 717.6
  Top Layer w10: IC11.8 1620.89,519.78 1674.78,519.78 v1(1675,520) ; v1(2290,530) 2294.06,530 2298.43,525.63 CFD_PACKAGE.41
  Bottom Layer w10: v1(1675,520) 2275.94,520 2285.94,530 v1(2290,530)
/SCAN_OUT_33: 1.37/A18 IC11.9 | length 397.8
  Top Layer w10: v1(1330,520) 1330.22,519.78 1389.11,519.78 IC11.9
  Bottom Layer w10: 1.37/A18 1310,540 v1(1330,520) v1@1330,515
/TIME_MAIN: IC3.3 IC4.2 IC7.4 | length 567.9
  Top Layer w10: v1(2580,1615) 2581.76,1615 2604.09,1592.67 IC4.2@2604.09,1583.15 ; IC4.2 2604.09,1581.34 2604.09,1567.41 2559.57,1522.88 2559.57,1481.13 2587.97,1452.73 2589.09,1452.73 2617.5,1424.32 2617.5,1405.68 2615.75,1403.93 2615.75,1378.9 IC3.3 ; v1(2685,1690) 2685.59,1690 2722.99,1727.4 IC7.4 ; v3(2685,1785) 2716.82,1753.18 2716.82,1734.21 2721.03,1730 IC7.4@2725,1730
  Bottom Layer w10: v1(2580,1615) 2655,1690 v1(2685,1690)
/TIME_SMALL: IC1.3 IC2.2 IC10.4 | length 569.2
  Top Layer w10: IC10.4 2352.01,1652.6 2385.38,1619.23 2442.53,1619.23 2469.09,1592.67 2469.09,1580.91 2470,1580 2469.09,1579.09 2469.09,1567.41 2424.57,1522.88 2424.57,1481.13 2480.16,1425.54 2480.16,1378.31 IC1.3 ; IC10.4@2350,1655 2354.41,1655 2358.82,1659.41 2358.82,1693.88 2373.82,1708.88 2373.82,1768.06 2360.81,1781.08 v3(2360.81,1794.61)
GND: 1.AGND 1.GND 1.GND2 C2.1 C3.1 C5.1 C6.1 C8.1 C9.1 C10.1 C11.1 C12.1 C13.1 C14.1 C15.1 C16.1 C17.1 C18.1 C19.1 C20.1 C21.1 C22.1 C23.1 C24.1 C25.1 C26.1 C27.2 C28.1 C29.1 C30.1 C31.1 C32.1 C33.1 C34.1 C35.1 C36.1 C37.1 C46.1 C48.1 C49.1 C50.1 CFD_PACKAGE.2 CFD_PACKAGE.7 CFD_PACKAGE.12 CFD_PACKAGE.21 CFD_PACKAGE.24 CFD_PACKAGE.35 CFD_PACKAGE.38 CFD_PACKAGE.40 CRAMP1.1 CRAMP.1 D9.2 D13.2 D17.2 D21.2 IC1.4 IC2.3 IC3.4 IC4.3 IC6.2 IC7.3 IC9.2 IC10.3 IC11.7 IC11.10 IC11.12 P3.1 P4.1 P5.2 P8.2 P11.2 P13.2 P14.2 P80.2 P81.2 pad.3 Q1.2 Q2.2 R4.1 R5.1 U1.2 U2.2 U3.2 | length 5678.4
  Top Layer w15: C8.1@2310,1545 2310,1550.47 2353.09,1593.56 2353.09,1613.09 v1(2355,1615) ; C22.1@2435,1260 2440.47,1260 2499.53,1319.06 IC1.4 ; v1(2479.84,1613.74) 2479.84,1611.03 2488.41,1602.47 2488.41,1583.52 IC2.3 ; v1(2615,1615) 2615,1612.29 2623.41,1603.89 2623.41,1583.52 IC4.3 ; IC3.4 2634.53,1260.47 C20.1@2635,1260 ; v1(2720,1615) 2721.91,1613.09 2721.91,1593.56 2765,1550.47 C5.1@2765,1545
  Top Layer w20: C48.1@1700,985 1700.47,985 1725.47,1010 D13.2 ; 1720,740 1730.57,740 ; 1752.1,718.46 C23.1 ; v1(1950,1690) IC9.2 1992.6,1691.81 2026.81,1691.81 2040,1705 2040,1778.8 2073.46,1812.26 2073.46,1886.54 CRAMP1.1@2070,1890 ; P14.2 1995,610.47 2015,590.47 C9.1@2015,590 ; C49.1@1995,990 1994.53,990 1956.46,1028.07 1956.46,1247.36 1965.24,1256.14 1968.74,1256.14 1996.06,1283.46 C46.1 ; C49.1@2000,990 2005.47,990 2025.47,1010 D17.2 ; C46.1@2005,1285 2005.47,1285 2025.47,1305 D9.2 2085.63,1311.1 2205.98,1431.46 2231.93,1431.46 2250,1449.53 C2.1@2250,1450 ; C17.1@2015,262.6 2015,265 2016.54,266.54 C17.1@2016.54,268.46 ; C9.1 C15.1 C17.1@2016.54,268.46 ; C17.1@2020,265 C17.1@2016.54,268.46 ; C6.1@2070,1550 2070,1550.47 2088.07,1568.54 2088.54,1568.54 2140,1620 v1(2205,1620) 2205.96,1620.96 2205.96,1630.56 2227.99,1652.6 IC10.3 ; C2.1 2246.54,1453.94 2273.86,1481.26 2273.86,1484.76 2298.86,1509.76 2298.86,1533.86 C8.1@2310,1545 ; C18.1@2321.93,261.93 C18.1@2325,265 ; C18.1@2335,275 2336.54,276.54 C14.1 C24.1 ; C5.1 2761.54,1546.06 2788.86,1518.74 2788.86,1515.24 2813.86,1490.24 2813.86,1466.14 C16.1@2830,1450 ; C16.1 2828.46,1347.01 2865,1310.47 D21.2@2865,1310 ; IC7.3 2847.01,1727.4 2869.04,1749.44 2869.04,1759.04 v1(2870,1760) 2870.96,1760.96 2876.43,1760.96 2995,1879.53 CRAMP.1@2995,1890 ; D21.2 2924.53,1305 2949.53,1280 C50.1@2950,1280 ; C11.1 C13.1 C10.1 2913.46,197.1 2930,180.57 2930,160 ; C12.1 3089.53,745 3115,719.53 C21.1@3115,715 ; v1(2945,1550) 3000,1550 3014.84,1564.84 3014.84,1608.54 3040,1633.7 3040,1675 3053.19,1688.19 3082.4,1688.19 IC6.2 ; C19.1 3134.61,261.93 3158.54,261.93 3160.47,260 3220,260 ; C21.1@3130,710 3185,710 3215,740 3450,740 ; v2(3220,120) 3220,255 3225,260
  Bottom Layer w15: v1(2355,1615) 2355.63,1614.37 2479.21,1614.37 v1(2479.84,1613.74) ; v1(2615,1615) v1(2720,1615)
  Bottom Layer w30: v1@2400.04,545 v1@2443.35,545 ; v1@2400.04,585.73 v1@2443.35,585.73 ; 2445,470 v1@2445,545 ; 2445,660 v1@2445,545 ; 2480,465 2485,470 v1@2485,545 ; 2485,665 v1@2485,545 ; v1@2486.65,545 v1@2529.96,545 ; v1@2486.65,585.73 v1@2529.96,585.73 ; v1@2445,545 v1@2485,545
  other v1: 2400.04,500.04 2443.35,500.04 2486.65,500.04 2529.96,500.04 2400.04,543.35 2443.35,543.35 2486.65,543.35 2529.96,543.35 2400.04,586.65 2443.35,586.65 2486.65,586.65 2529.96,586.65 2400.04,629.96 2443.35,629.96 2486.65,629.96 2529.96,629.96
  other v2: 1203.86,120 2135,120 3555,740 2775,1060 1215,1715 3555,2030 1215,2215 1215,2715 2215,2715 2715,2715 3215,2715 1715,2720
IIN: C1.1 Q3.3 R3.2
IIN_COUPLE: C1.2 CFD_PACKAGE.28 | length 156.9
  Top Layer w10: C1.2@2488.96,819.43 2499.53,830 C1.2@2510,830
  Top Layer w15: CFD_PACKAGE.28 2465,749.75 2488.96,773.71 C1.2@2488.96,819.43
NetC3_2: C3.2 IC5.2 RRAMP.2 | length 519
  Top Layer w10: C3.2@3070,1555 3070,1555.47 3088.07,1573.54 3088.54,1573.54 3122.5,1607.5 3147.5,1607.5 v1(3150,1610) ; RRAMP.2 3314.53,1734.21 3318.74,1730 IC5.2@3330,1730 ; v1(3315,1690) 3315,1720.59 3321.81,1727.4 IC5.2
  Bottom Layer w10: v1(3150,1610) 3235,1610 v1(3315,1690)
NetC4_1: C4.1 IC5.3 IC6.3 IC6.4 IC7.2 | length 602.5
  Top Layer w10: IC7.2 2935.59,1690 2975.59,1730 IC6.4@2990,1730 ; IC6.4 IC6.3 IC6.3@3087.4,1727.4 ; IC6.3@3090,1730 IC6.3@3087.4,1727.4 ; IC5.3 IC5.3@3243.66,1685 ; IC5.3@3245,1685 IC5.3@3243.66,1685 ; C4.1@3255,1545 3243.66,1556.34 IC5.3@3243.66,1685 ; IC6.3@3087.4,1727.4 3193.46,1727.4 3235.87,1685 IC5.3@3243.66,1685
NetC4_2: C4.2 D1.1 IC5.1 | length 213.7
  Top Layer w10: D1.1@3310,1450 3310,1541.54 C4.2 ; C4.2@3320,1545 3326.34,1551.34 IC5.1
NetC6_2: C6.2 IC8.2 RRAMP1.2 | length 577.2
  Top Layer w10: IC8.2 IC8.2@1761.46,1652.6 ; RRAMP1.2@1760,1895 1760,1803.73 1783.27,1780.46 1783.27,1708.88 1768.27,1693.88 1768.27,1659.41 IC8.2@1761.46,1652.6 ; v1(1785,1605) 1785,1609.06 1768.27,1625.79 1768.27,1645.79 IC8.2@1761.46,1652.6 ; v1(1925,1605) 1927.5,1602.5 1952.5,1602.5 1981.46,1573.54 1986.93,1573.54 2005,1555.47 C6.2@2005,1550
  Bottom Layer w10: v1(1785,1605) v1(1925,1605)
NetC7_1: C7.1 IC8.3 IC9.3 IC9.4 IC10.2 | length 588.8
  Top Layer w10: C7.1@1820,1550 1820,1683.19 1826.81,1690 IC8.3 1844.13,1690 1881.54,1652.6 IC9.3 2087.6,1652.6 IC9.4@2090,1655 ; IC9.4 2149.7,1652.6 2187.11,1690 IC10.2@2240,1690
NetC7_2: C7.2 D2.1 IC8.1 | length 317.6
  Top Layer w10: IC8.1 1735.87,1727.4 1729.06,1720.59 1729.06,1686.12 1714.06,1671.12 1714.06,1636.65 1755,1595.7 C7.2@1755,1550 ; C7.2 1756.54,1453.46 D2.1@1760,1450
NetC25_2: C25.2 Q3.2 R5.2 | length 108.9
  Top Layer w20: Q3.2 2695.59,915.59 R5.2@2700,920 ; R5.2 2704.25,920 2705.08,920.83 2705.08,970.08 C25.2@2715,980
NetC31_2: C31.2 U1.4 | length 106.7
  Top Layer w30: U1.4 1612.32,1219.41 1656.06,1219.41 1690,1185.47 C31.2@1690,1175
NetC34_2: C34.2 U2.4 | length 103.8
  Top Layer w30: C34.2@2210,2110 2210.47,2110 2249.41,2148.94 2249.41,2192.68 U2.4
NetC37_2: C37.2 U3.4 | length 101.4
  Top Layer w30: U3.4 1577.32,119.41 1621.06,119.41 1655.47,85 C37.2@1660,85
NetCFD_PACKAGE_26: CFD_PACKAGE.26 IC3.1 | length 715.2
  Top Layer w10: IC3.1@2575,1375 2575.47,1374.53 2575.47,1298.59 2585,1289.06 v1(2585,1285)
  Top Layer w15: CFD_PACKAGE.26 2504.37,704.84 2507.62,708.09 2507.62,718.46 2539.16,750 v1(2540,750)
  Bottom Layer w10: v1(2540,750) 2585,795 v1(2585,1285)
NetCFD_PACKAGE_30: CFD_PACKAGE.30 IC1.1 | length 715.8
  Top Layer w10: CFD_PACKAGE.30@2425.63,710.59 2425.63,756.34 2445.32,776.03 2445.32,814.68 2440,820 2396.46,863.54 2396.46,1323.15 2440,1366.69 IC1.1@2440,1380
NetCRAMP1_2: CRAMP1.2 IC9.1 Q2.3 RRAMP1.1 | length 650.9
  Top Layer w10: RRAMP1.1 CRAMP1.2@1995,1890 ; IC9.1 1990.79,1875.79 CRAMP1.2@2000,1885
  Top Layer w30: Q2.3@1890,2155 1891.34,2155 1944.51,2101.83 1944.51,1955.96 2006.54,1893.94 CRAMP1.2
NetCRAMP_2: CRAMP.2 IC6.1 Q1.3 RRAMP.1 | length 798.1
  Top Layer w10: IC6.1@3085,1650 3094.41,1659.41 3115.35,1659.41 3130.94,1675 v1(3135,1675) ; v1(3135,1760) 3068.46,1826.54 CRAMP.2 3255,1890 RRAMP.1@3255,1895.39
  Top Layer w30: Q1.3@3165,2155 3166.34,2155 3255.47,2065.87 RRAMP.1
  Bottom Layer w10: v1(3135,1675) v1(3135,1760)
NetD1_2: D1.2 R1.1 | length 209.2
  Top Layer w10: R1.1 D1.2 D1.2@3260,1450
NetD2_2: D2.2 R2.1 | length 208.4
  Top Layer w10: D2.2 R2.1 R2.1@2025,1450
RST_TEST: CFD_PACKAGE.16 IC11.1 | length 1373.7
  Top Layer w10: IC11.1 1640.85,340.43 1668.41,312.87 1682.13,312.87 v1(1685,310) ; CFD_PACKAGE.16 2598.03,545.16 2644.84,545.16 v1(2645,545)
  Bottom Layer w10: v1(1685,310) 1990,310 2130,170 2280,170 2452.5,342.5 2572.5,342.5 2645,415 v1(2645,545)
RST_TEST_33: 1.33/A14 IC11.16 | length 467.4
  Top Layer w10: v1(1352.34,323.62) 1369.15,340.43 IC11.16
  Bottom Layer w10: 1.33/A14 1155,140 1322.5,307.5 1332.16,307.5 1348.28,323.62 v1(1352.34,323.62)
RST_TIME: 1.23/A9 Q1.1 Q2.1 | length 2106.1
  Top Layer w20: 1.23/A9@1008.74,2135 1675,2135 1730,2190 v1(1995,2190) ; v1(2810,2190) 3085,2190 Q1.1@3090,2185
  Bottom Layer w20: v1(1995,2190) v1(2810,2190)
SCAN_CLK: CFD_PACKAGE.43 IC11.6 | length 738
  Top Layer w10: IC11.6@1628.54,468.54 1632.24,472.24 1663.19,472.24 1670.94,480 v1(1675,480) ; v1@2205.35,444.65 2242.53,444.65 2284.14,486.26 CFD_PACKAGE.43
  Bottom Layer w10: v1(1675,480) 1908.94,480 1941.44,447.5 2200.33,447.5 v1(2203.17,444.65)
SCAN_CLK_33: 1.36/A17 IC11.11 | length 397.4
  Top Layer w10: v1(1330,470) 1330.81,469.19 1388.52,469.19 IC11.11
  Bottom Layer w10: 1.36/A17 1300,440 v1(1330,470)
TIME_MAIN: IC3.5 P15.1 | length 277.8
  Top Layer w10: P15.1@2590,1755 2642.18,1702.82 2642.18,1570.54 2634.53,1562.89 IC3.5
TIME_MAIN_OUT: IC4.4 P10.1 | length 313.7
  Top Layer w10: P10.1 2545.47,1870.47 2545.47,1726.33 2582.68,1689.12 2586.57,1689.12 2624.68,1651 IC4.4
TIME_SMALL: IC1.5 P15.2 | length 270.4
  Top Layer w10: P15.2 2494.39,1750.61 2494.39,1715.93 2507.18,1703.13 2507.18,1570.54 2499.53,1562.89 IC1.5
TIME_SMALL_OUT: IC2.4 P10.2 | length 296.9
  Top Layer w10: P10.2 2445.47,1870.47 2445.47,1743.63 2489.68,1699.41 IC2.4
VBG_TEST: C19.2 CFD_PACKAGE.15 P5.1 | length 761.9
  Top Layer w10: CFD_PACKAGE.15 2630.59,525.63 2633.72,522.5 2645.68,522.5 2813.18,355 v1(2885,355) ; v1(2945,355) C19.2@3105,355 ; C19.2@3115,345 C19.2@3105,355 ; C19.2@3115,355 C19.2@3105,355 ; C19.2@3125,360 P5.1@3285,360
  Bottom Layer w10: v1(2885,355) v1(2945,355)
VDAC_MAIN: C21.2 CFD_PACKAGE.22 P8.1 | length 706.8
  Top Layer w10: CFD_PACKAGE.22 3108.11,663.43 C21.2 3131.54,640 P8.1 P8.1@3295,640
VDAC_SMALL: C23.2 CFD_PACKAGE.34 P11.1 | length 749.2
  Top Layer w10: P11.1@1655,640 1720,640 1731.54,651.54 C23.2 ; C23.2@1820,650 1904.1,650 1978.63,724.53 2128.67,724.53 2203.2,650 2267.21,650 2280.63,663.43 CFD_PACKAGE.34
VDDAON: C17.2 C18.2 C24.2 CFD_PACKAGE.3 CFD_PACKAGE.9 CFD_PACKAGE.42 P81.1 | length 1089.7
  Top Layer w10: 2270,505 CFD_PACKAGE.42@2319.41,505
  Top Layer w20: C17.2@2080,265 C17.2 2175.33,265 ; P81.1 2195,265 2175.33,265 ; v1(2235,470) 2270,505 ; C18.2@2332.6,345 C18.2@2335,345 ; CFD_PACKAGE.3 2406.69,431.38 2406.69,399.66 2415,391.35 v1(2415,390) 2415,388.65 2400.68,374.33 2400.68,370.68 2370,340 2338.46,340 C18.2 2253.8,343.46 2175.33,265 ; CFD_PACKAGE.9 2524.06,390.94 2530,385 ; v1@2540,374.53 2571.06,343.46 C24.2
  Bottom Layer w20: P81.1 v1(2235,470) ; v1(2415,390) 2523.65,390 2538.65,375 v1(2540,375)
VDDHV: C13.2 C14.2 C15.2 CFD_PACKAGE.5 CFD_PACKAGE.14 CFD_PACKAGE.39 | length 1810.9
  Top Layer w10: CFD_PACKAGE.14 2630.59,505.94 2701.59,434.95 v1(2701.59,431.59)
  Top Layer w20: C15.2 v1@2139.04,425 ; v1@2139.52,425.48 2279.04,565 CFD_PACKAGE.39@2320,565 ; v1(2140,220) 2182.5,177.5 2182.5,114.53 2216.56,80.47 2406.14,80.47 2445.67,120 v2(2455,120) v2@2460,120 ; CFD_PACKAGE.5 2445.32,358.07 2448.39,355 C14.2@2455,355 ; C14.2 2469.61,328.86 2504.79,328.86 ; v1(2770,430) 2770.96,429.04 2835.96,429.04 C13.2@2845,420
  Bottom Layer w20: v1(2140,220) v1(2140,425) ; v2(2455,120) 2515,180 v1(2515,320) 2590,320 v1@2700,430 ; v1(2701.59,431.59) 2702.39,430.8 2769.2,430.8 v1(2770,430)
  other v3: 2330,80
VDDMAIN: C11.2 C12.2 CFD_PACKAGE.20 CFD_PACKAGE.25 P13.1 | length 972.9
  Top Layer w10: CFD_PACKAGE.25 2524.06,686.22 2529.8,680.47 2529.8,678.32 2538.12,670 2570,670 ; 2571.12,670.16 2600.96,700 2690.95,700 2700.95,690 v1(2795,690)
  Top Layer w20: CFD_PACKAGE.20 v1@2809.06,624.06 ; v1(2795,690) 2795.47,690 2846.54,741.06 C12.2 ; v1(2810,625) 2810.47,625 2846.54,588.94 C11.2
  Bottom Layer w20: v1(2810,625) 2810,673.65 2795,688.65 v1(2795,690) 2829.62,724.62 2829.62,729.62 P13.1
VDDSMALL: C9.2 CFD_PACKAGE.36 P14.1 | length 351.7
  Top Layer w10: 2300,625 CFD_PACKAGE.36@2319.41,625
  Top Layer w20: C9.2 2089.23,585 2260,585 2300,625 ; C9.2@2085,590 2089.23,594.23 2089.23,679.23 P14.1
VDDTEST: C10.2 CFD_PACKAGE.13 P80.1 | length 583.5
  Top Layer w10: CFD_PACKAGE.13 2598.94,485.2 2619.8,485.2 2635,470
  Top Layer w20: 2635,470 2635,390 2741.93,283.07 2831.93,283.07 2845,270 C10.2@2840.77,265.77 ; P80.1@2830,85 P80.1 2840.77,95.77 2840.77,259.23 C10.2 ; P80.1@2830,90 P80.1@2835,95
VIN: Q3.1 R4.2
  other v3: 2635,785
VIN_TEST: CFD_PACKAGE.17 D19.2 D21.1 | length 920.9
  Top Layer w10: CFD_PACKAGE.17 2631.21,565 2633.71,567.5 2657.5,567.5 v3(2700,525)
  Top Layer w15: v1@2685,1036.35 2685,1083.27 2730,1128.27 D19.2@2730,1135
  Top Layer w20: D19.2@2735,1140 2735.63,1140.63 D21.1
  Bottom Layer w15: v1(2685.03,1036.33) 2685.03,1033.62 2700,1018.65 v3(2700,525)
VINN_ZCD_SMALL: CFD_PACKAGE.32 D15.2 D17.1 | length 392.8
  Top Layer w10: v3@2300,790 2307.94,790 2380.51,717.43 2380.51,715.28 2386.26,709.53 CFD_PACKAGE.32
  Top Layer w20: D17.1 D15.2 2214.37,853.9 2265.61,802.65 v3@2297.35,802.65
  other v3: 2300,795
VINP_LED_SMALL: CFD_PACKAGE.31 D5.2 D9.1 | length 681.4
  Top Layer w10: v3(2400,795) 2404.88,790.12 2404.88,698.94 CFD_PACKAGE.31 ; v3@2415,795 v3@2415.39,794.61
  Top Layer w20: D5.2 2214.37,1148.9 2315,1048.27 2315,880 v3(2400,795) ; D5.2@2214.37,1160.63 D9.1
VINP_ZCD_SMALL: CFD_PACKAGE.33 D11.2 D13.1 | length 674.9
  Top Layer w10: v3(2245,690) CFD_PACKAGE.33@2365,690
  Top Layer w20: D11.2@1910,860 1914.37,864.37 D13.1 ; D11.2 2021.48,860 2185,696.48 2233.52,696.48 v3@2245,685
VOUT_TEST: CFD_PACKAGE.18 | length 154.5
  Top Layer w10: CFD_PACKAGE.18 2744.37,584.69 v3(2750,579.06)
VREF_ATTEN: C20.2 CFD_PACKAGE.27 | length 636.7
  Top Layer w10: CFD_PACKAGE.27 2484.69,744.69 v1(2520,780) ; v3(2535,1175) 2544.57,1165.43 2544.57,1130.43 2560,1115 ; v1(2560,1005) 2560,1115 ; C20.2@2635,1190 2629.53,1190 2611.46,1171.93 2611.46,1166.46 2560,1115
  Bottom Layer w10: v1(2520,780) 2524.06,780 2541.07,797.01 2552.01,797.01 2560,805 v1(2560,1005)
VREF_PREAMP: C22.2 CFD_PACKAGE.29 | length 847.9
  Top Layer w10: C22.2 v1(2435,870) 2465,840 2465,774.5 2445.32,754.81 CFD_PACKAGE.29@2445.32,710.59
  Bottom Layer w10: v3(2335,1175) 2335,970 v1(2435,870)
VTAC_MAIN: 1.21/A7 IC7.1 | length 2059.7
  Top Layer w20: 1.21/A7 1010.35,1940 1050.35,1980 v1(1910,1980) ; v1(2710,1915) 2710,1845 2775.39,1779.61 2775.39,1689.61 IC7.1@2816.91,1648.09
  Bottom Layer w20: v1(1910,1980) 2645,1980 v1(2710,1915)
VTAC_SMALL: 1.20/A6 IC10.1 | length 1305.8
  Top Layer w10: IC10.1@2245,1727.4 2253.58,1727.4 IC10.1@2260.39,1734.21
  Top Layer w20: 1.20/A6 v1(1720,1840) ; v1(2130,1840) IC10.1@2245,1725
  Bottom Layer w20: v1(1720,1840) v1(2130,1840)
pads on no net: 1.0/RX 1.1/TX 1.2 1.3/CANTX 1.3V3 1.3V3_2 1.3V3_LO 1.4/CANRX 1.5 1.6 1.7 1.8 1.9/CS 1.10/CS 1.11/MOSI 1.12/MISO 1.13/SCK 1.14/A0 1.15/A1 1.16/A2 1.18/A4/SDA 1.19/A5/SCL 1.21/DAC0 1.22/A8 1.24 1.25 1.26 1.27 1.28 1.29 1.30 1.31/A12 1.32/A13 1.38/A19 1.39/A20 1.A10 1.A11 1.A22/DAC1 1.AREF 1.GND3 1.PROG 1.RESET 1.U5V 1.UD+ 1.UD- 1.UGND1 1.UGND2 1.VBAT 1.VIN 1.VUSB CFD_PACKAGE.4 CFD_PACKAGE.6 CFD_PACKAGE.8 CFD_PACKAGE.10 CFD_PACKAGE.11 CFD_PACKAGE.19 CFD_PACKAGE.23 CFD_PACKAGE.37 IC2.1 IC4.1

## Polygon pours and split planes (outlines as drawn)
GND on Top Layer "NONET_L-01_P-001" (solid, remove dead copper, pour order 2): 0,0 0,2835 3675,2835 3675,0
IIN on Top Layer "NONET_L-01_P-001" (solid, remove dead copper, pour order 1): 2470,985 2605,985 2605,875 2470,875
VIN on Top Layer "NONET_L-01_P-001" (solid, pour order 0): 2615,765 2615,890 2710,890 2710,765
GND on Bottom Layer "NONET_L-01_P-001" (solid, remove dead copper, pour order 10): 0,1670 1645,1670 1645,880 3245,880 3245,2085 1645,2085 1645,1670 0,1670 0,2835 3675,2835 3675,0 0,0
+1.8VD on Bottom Layer "NONET_L-01_P-001" (solid, remove dead copper, pour order 4): 2210,1365 2210,1945 2865,1945 2865,1365
+5VD on Bottom Layer "NONET_L-01_P-001" (solid, remove dead copper, pour order 8): 1650,1365 1650,2080 3240,2080 3240,1365 2870,1365 2870,1950 2205,1950 2205,1365
+1.8VA on Bottom Layer "NONET_L-01_P-001" (solid, remove dead copper, pour order 3): 1650,885 1650,1365 3240,1365 3240,885

## Silkscreen, mask and mechanical layers (free items; w line width, h text height)
Top Overlay:
  text "GND" at 1754.99,2799 h30 r180
  text "GND" at 1254.99,2794 h30 r180
  text "GND" at 2254.99,2794 h30 r180
  text "GND" at 2754.99,2794 h30 r180
  text "GND" at 3254.99,2794 h30 r180
  text "GND" at 2015.05,2485 h60
  text "+3.3VD" at 1845.11,2390 h60
  text "GND" at 3629,1989.03 h30 r90
  text "TSMALL" at 2499,1981 h30 r90
  text "TMAIN" at 2599,1981 h30 r90
  text "+5VD" at 3629,1744.04 h30 r90
  text "+1.8VD" at 3629,1534.05 h30 r90
  text "PREAMP" at 2354,1221 h30 r90
  text "->" at 2601.51,1115 h30 r135
  text "+1.8VA" at 3629,1114.05 h30 r90
  text "+10VRF" at 2244.07,1056 h40
  text "ATTEN" at 2639,1001 h30 r90
  text "GND" at 1275,985.05 h60 r90
  text "VDDMAIN" at 2946,936 h30
  text "ZCD_N" at 2309,836 h30 r90
  text "LED_P" at 2409,836 h30 r90
  text "+3.3VA" at 1380,815.11 h60 r90
  text "VIN" at 2683.35,759.08 h30
  text "VDDSMALL" at 2011,751 h30
  text "GND" at 3629,699.03 h30 r90
  text "VOUT_TEST" at 2726,636 h30
  text "VDAC_SMALL" at 1289.09,621 h30
  text "VDAC_MAIN" at 3059.08,541 h30
  text "ZCD_P" at 2259,509.05 h30 r90
  text "VIN_TEST" at 2726,491 h30
  text "VBG_TEST" at 3089.07,456 h30
  text "VDDAON" at 2000.98,331 h30
  text "VDDTEST" at 2569.06,111 h30
  text "GND" at 2015.01,106 h30
  text "+3.3VD_SHIFT" at 1265.06,56 h30
  text "GND" at 1159.03,51 h30
  text "VDDHV" at 2374.05,51 h30
  text "GND" at 3179.03,51 h30
  text "+1.8VD_SHIFT" at 1807.55,31 h30